# Altium PCB DCCController.1.0.PcbDoc
Units mm, origin at the board's own origin, x right, y up, seen from the top; angles counter-clockwise.
Board outline 152.4 x 101.6 mm, 2 copper layers (Top Layer, Bottom Layer); 54 components, 75 nets, 242 pads, 18 vias.
Unrouted connection lines stored in the file: 1.
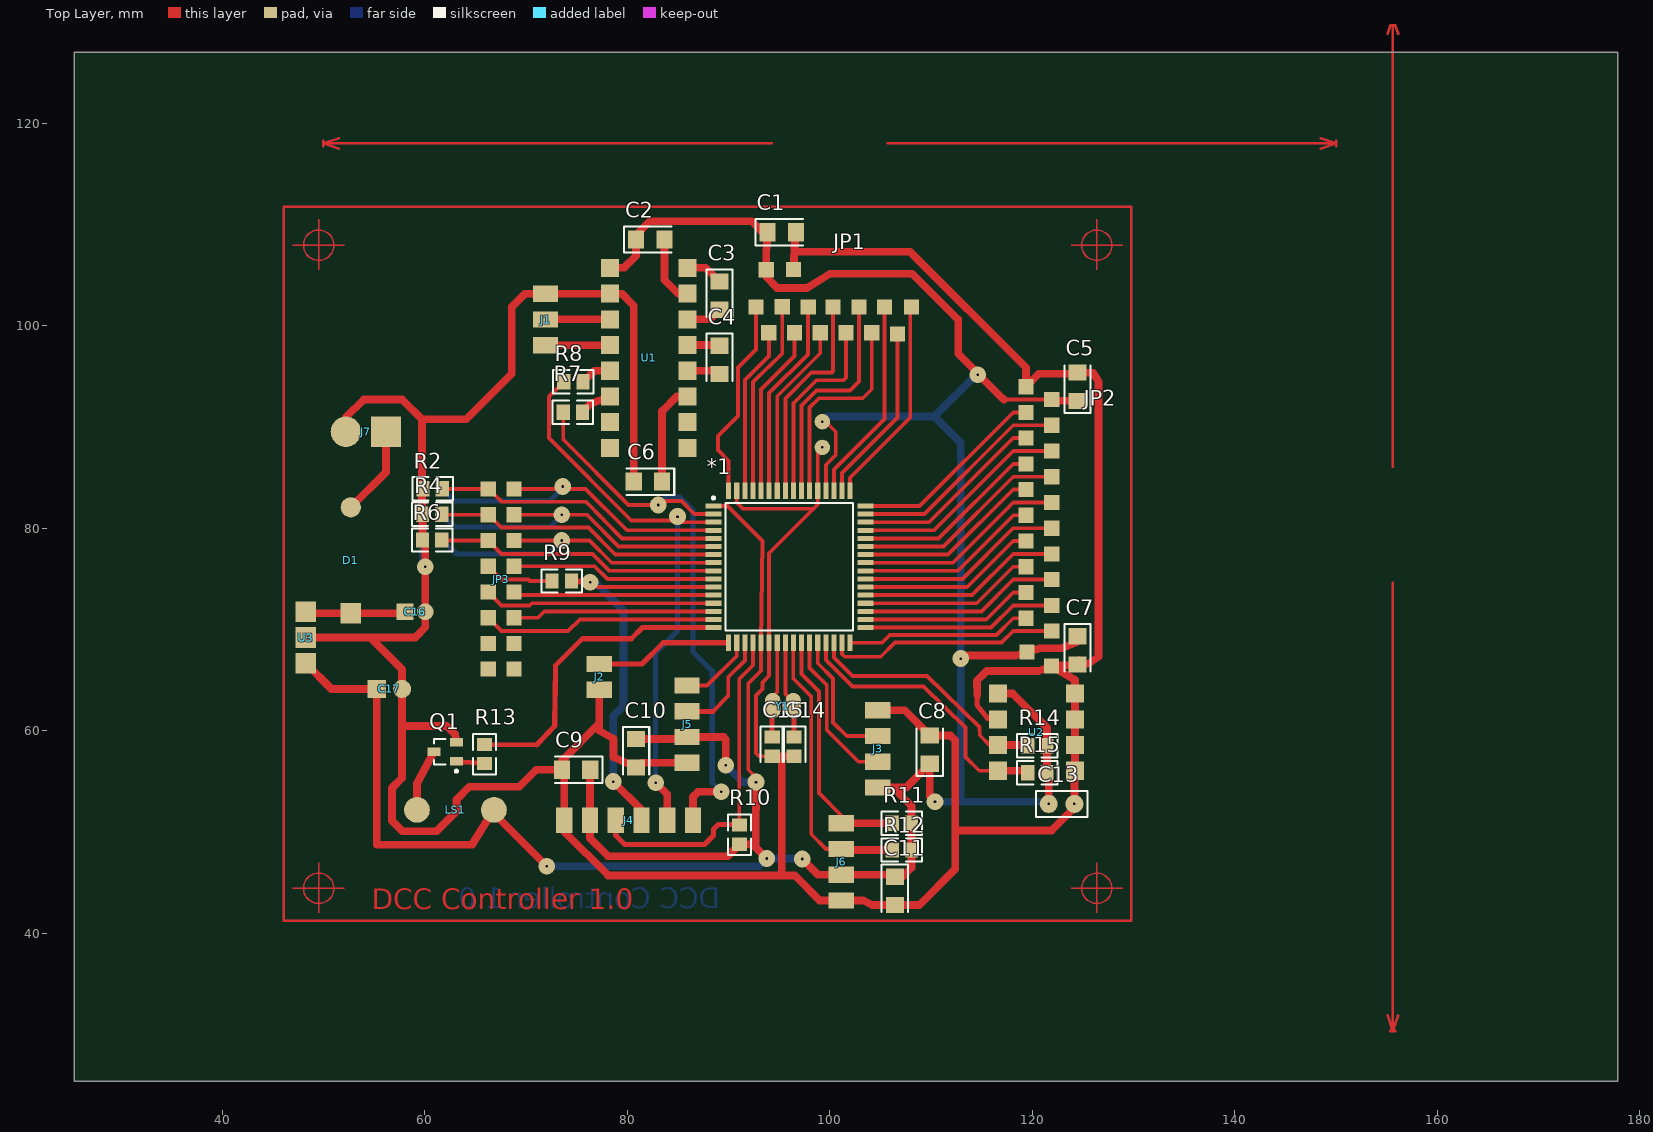
[diagram p0: Top Layer view]
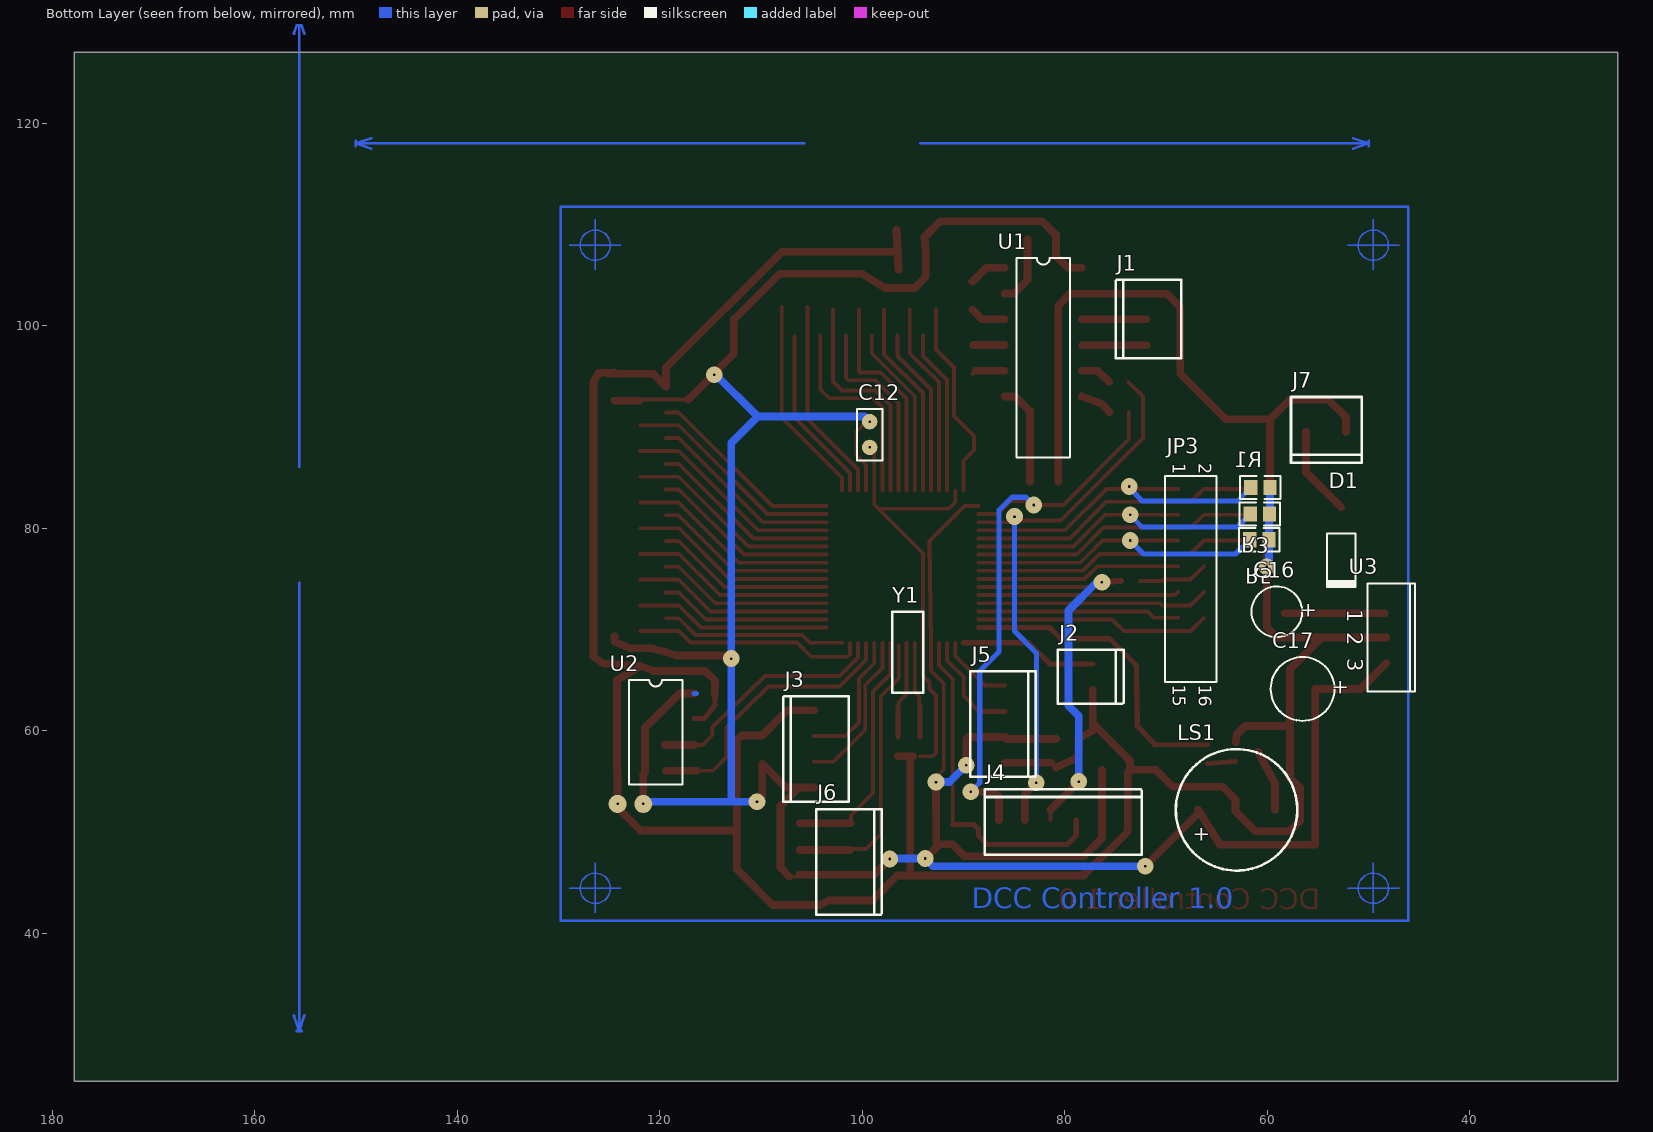
[diagram p1: Bottom Layer view, seen from below]

## Layer stack, top to bottom
Top Layer: signal copper 0.0356
Dielectric: dielectric 0.32, FR-4, Dk 4.8
Bottom Layer: signal copper 0.0356

## Board outline
25.4,25.4 177.8,25.4 177.8,127 25.4,127

## Design rules (kind name [scope] priority, off if disabled: settings)
Clearance [All] p1: gap=0.254
ComponentClearance [All] p1: gap=0.254 collisioncheckmode=0
PolygonConnect [All] p1: connectstyle=Relief reliefconductorwidth=0.254 reliefentries=4 polygonreliefangle="90 Angle"
RoutingLayers [All] p1: top layer=Horizontal bottom layer=Vertical
RoutingVias [All] p1: holewidth=0.711 width=1.27 viastyle="Through Hole" minholewidth=0.711 minwidth=1.27 maxholewidth=0.711 maxwidth=1.27
SolderMaskExpansion [All] p1: expansion=0.102
TestPointUsage [All] p1: valid=0 allowmultiple=FALSE
Testpoint [All] p1: side=15 testpointundercomponent=TRUE minsize=1.016 maxsize=2.54 preferedsize=1.524 minholesize=0 maxholesize=1.016 preferedholesize=0.813 testpointgrid=0.025 style=1023 order=-539222988
Width [All] p1: maxlimit=1.27 minlimit=0.254 preferedwidth=0.508 toplayer_prefwidth=0.762 bottomlayer_prefwidth=0.762 minimp=50.000000 maximp=50.000000 favimp=50.000000
16 further rules are at their usual default settings.

## Classes and differential pairs
component class DCCController: *1 C1 C2 C3 C4 C5 C6 C7 C8 C9 C10 C11 C12 C13 C14 C15 C16 C17 D1 J1 J2 J3 J4 J5 J6 J7 JP1 JP2 JP3 LS1 Q1 R1 R2 R3 R4 R5 R6 R7 R8 R9 R10 R11 R12 R13 R15 U1 U2 U3 Y1

## Components (designator, comment, footprint, x,y, rotation, side; value= is the part's Value field where it differs from the comment)
*1 "Atmega128" 64A 96.012,76.2 r0 top
C1 "Cap Pol1" CC3216-1206 95.25,109.22 r0 top
C2 "Cap Pol1" CC3216-1206 82.271,108.509 r0 top
C3 "Cap Pol1" CC3216-1206 89.103,102.972 r270 top
C4 "Cap Pol1" CC3216-1206 89.103,96.622 r270 top
C5 "Cap Pol1" CC3216-1206 124.46,93.98 r90 top
C6 "Cap Pol1" CC3216-1206 82.042,84.607 r180 top
C7 "Cap Pol1" CC3216-1206 124.46,67.945 r270 top
C8 "Cap Pol1" CC3216-1206 109.88,58.141 r90 top
C9 "Cap Pol1" CC3216-1206 74.955,56.159 r180 top
C10 "Cap Pol1" CC3216-1206 80.874,57.785 r270 top
C11 "Cap Pol1" CC3216-1206 106.426,44.196 r270 top
C12 "Cap" RAD-0.1#1 99.263,89.256 r270 bottom
C13 "Cap" RAD-0.1#2 122.885,52.781 r0 top
C14 "Cap" CC2012-0805 96.469,58.445 r270 top
C15 "Cap" CC2012-0805 94.31,58.445 r270 top
C16 "Cap Pol1" CAPPR2-5X11 59.055,71.755 r0 bottom
C17 "Cap Pol1" CAPPR2.5-6.3X11.5 56.515,64.135 r0 bottom
D1 "Diode 1N4001" DIO10.46-5.3x2.8 52.705,76.835 r270 bottom
J1 "RS232" "0.1 SIP 3 PIN" 69.393,98.069 r180 bottom
J2 "DCCOut" "0.1 SIP 2 PIN" 79.781,69.139 r0 bottom
J3 "LCD" "0.1 SIP 4 PIN" 102.21,56.947 r180 bottom
J4 "ISP" "0.1 SIP 6 PIN" 78.867,48.641 r270 bottom
J5 "Throttle Quadrature" "0.1 SIP 4 PIN" 88.443,61.925 r0 bottom
J6 "External CABs" "0.1 SIP 4 PIN" 103.657,48.336 r0 bottom
J7 "SIP2 CONNECTOR" "0.156 SIP 2 PIN" 48.26,92.075 r90 bottom
JP1 "Header 15" HDR1X15 90.551,119.38 r0 top
JP2 "Header 22" HDR1X22 148.844,106.68 r270 top
JP3 "Keypad" HDR2X8 68.809,83.871 r270 bottom
LS1 "Buzzer" "Mini PC Mount Piezo" 66.833,52.197 r180 bottom
Q1 "" SO-G3 62.027,57.937 r90 top
R1 "Res2" CR2012-0805 60.681,84.023 r180 bottom
R2 "Res2" CR2012-0805 60.782,83.896 r180 top
R3 "Res2" CR2012-0805 60.731,81.407 r180 bottom
R4 "Res2" CR2012-0805 60.731,81.382 r180 top
R5 "Res2" CR2012-0805 60.782,78.867 r180 bottom
R6 "Res2" CR2012-0805 60.731,78.842 r180 top
R7 "Res2" CR2012-0805 74.625,91.465 r180 top
R8 "Res2" CR2012-0805 74.676,94.463 r180 top
R9 "Res2" CR2012-0805 73.533,74.803 r0 top
R10 "Res2" CR2012-0805 91.084,49.759 r90 top
R11 "Res2" CR2012-0805 107.112,50.876 r0 top
R12 "Res2" CR2012-0805 107.112,48.235 r0 top
R13 "Res1" R2012-0805 65.913,57.709 r270 top
R14 "Res2" CR2012-0805 120.498,58.522 r180 top
R15 "Res2" CR2012-0805 120.498,55.855 r180 top
U1 "MAX232ACPE" PE16A 82.118,96.825 r270 bottom
U2 "24LC256" 8P3 120.396,59.868 r270 bottom
U3 "LM7805CT" T03B 48.26,69.215 r270 bottom
Y1 "XTAL" "Xtal Cylinder" 95.504,62.484 r180 bottom
? "" Crosshair 126.365,107.95 r270 top
? "" Crosshair 126.365,44.45 r270 top
? "" Crosshair 49.53,44.45 r270 top
? "" Crosshair 49.53,107.95 r270 top

## Footprints (in the part's own frame and the unit in brackets; to place one, negate y for a bottom-side part, rotate by r counter-clockwise, add the part's x,y. Pads: shape width x height; smd on the part's side, far side on the other; paste and mask are expansions set on the pad)
"0.1 SIP 2 PIN" [mm] "0.1 SIP 2 PIN"
  rect 2.5x1.6 smd far side: 1(-2.54,5.08) 2(-2.54,2.54)
  silkscreen extent -5.59,1.14 0.89,6.48
"0.1 SIP 3 PIN" [mm] "0.1 SIP 3 PIN"
  rect 2.5x1.6 smd far side: 1(-2.54,5.08) 2(-2.54,2.54) 3(-2.54,0)
  silkscreen extent -5.59,-1.27 0.89,6.48
"0.1 SIP 4 PIN" [mm] "0.1 SIP 4 PIN"
  rect 2.5x1.6 smd far side: 1(-2.54,5.08) 2(-2.54,2.54) 3(-2.54,0) 4(-2.54,-2.54)
  silkscreen extent -5.59,-3.94 0.89,6.48
"0.1 SIP 6 PIN" [mm] "0.1 SIP 6 PIN"
  rect 2.5x1.6 smd far side: 1(-2.54,5.08) 2(-2.54,2.54) 3(-2.54,0) 4(-2.54,-2.54) 5(-2.54,-5.08) 6(-2.54,-7.62)
  silkscreen extent -5.59,-9.02 0.89,6.48
"0.156 SIP 2 PIN" [mm]
  rect 3x3 smd far side: 1(-2.54,7.92)
  round 3 smd far side: 2(-2.54,3.96)
  silkscreen extent -5.59,2.41 0.89,9.4
8P3 [mil] "DIP; 8 Leads; Row Spacing 7.62 mm; Pitch 2.54 mm"
  rect 70x70 smd far side: 1(-150,-150) 2(-50,-150) 3(50,-150) 4(150,-150) 5(150,150) 6(50,150) 7(-50,150) 8(-150,150)
  silkscreen extent -203,-104 203,104
64A [mm] "QFP; 64 Leads; Body 14 x 14 mm; Pitch 0.8 mm"
  rect 1.6x0.5 smd: 1(-7.5,6) 2(-7.5,5.2) 3(-7.5,4.4) 4(-7.5,3.6) 5(-7.5,2.8) 6(-7.5,2) 7(-7.5,1.2) 8(-7.5,0.4) 9(-7.5,-0.4) 10(-7.5,-1.2) 11(-7.5,-2) 12(-7.5,-2.8) 13(-7.5,-3.6) 14(-7.5,-4.4) 15(-7.5,-5.2) 16(-7.5,-6) 33(7.5,-6) 34(7.5,-5.2) 35(7.5,-4.4) 36(7.5,-3.6) 37(7.5,-2.8) 38(7.5,-2) 39(7.5,-1.2) 40(7.5,-0.4) 41(7.5,0.4) 42(7.5,1.2) 43(7.5,2) 44(7.5,2.8) 45(7.5,3.6) 46(7.5,4.4) 47(7.5,5.2) 48(7.5,6)
  rect 0.5x1.6 smd: 17(-6,-7.5) 18(-5.2,-7.5) 19(-4.4,-7.5) 20(-3.6,-7.5) 21(-2.8,-7.5) 22(-2,-7.5) 23(-1.2,-7.5) 24(-0.4,-7.5) 25(0.4,-7.5) 26(1.2,-7.5) 27(2,-7.5) 28(2.8,-7.5) 29(3.6,-7.5) 30(4.4,-7.5) 31(5.2,-7.5) 32(6,-7.5) 49(6,7.5) 50(5.2,7.5) 51(4.4,7.5) 52(3.6,7.5) 53(2.8,7.5) 54(2,7.5) 55(1.2,7.5) 56(0.4,7.5) 57(-0.4,7.5) 58(-1.2,7.5) 59(-2,7.5) 60(-2.8,7.5) 61(-3.6,7.5) 62(-4.4,7.5) 63(-5.2,7.5) 64(-6,7.5)
  silkscreen extent -7.62,-6.3 6.3,6.92
CAPPR2-5X11 [mil]
  rect 65x65 smd far side: 1(-39.37,0)
  round 65 smd far side: 2(39.37,0)
  silkscreen extent -98,-98 98,98
CAPPR2.5-6.3X11.5 [mil]
  rect 70x70 smd far side: 1(-49.21,0)
  round 70 smd far side: 2(49.21,0)
  silkscreen extent -124,-124 124,124
CC2012-0805 [mm]
  rect 1.3x1.5 smd: 1(-0.95,0) 2(0.95,0)
  silkscreen extent -2,-1.15 1.5,1.15
CC3216-1206 [mm]
  rect 1.6x1.8 smd: 1(-1.4,0) 2(1.4,0)
  silkscreen extent -2.6,-1.3 2.1,1.3
CR2012-0805 [mm]
  rect 1.3x1.5 smd: 1(-0.95,0) 2(0.95,0)
  silkscreen extent -2,-1.15 2,1.15
Crosshair [mm] "Mounting Hole pad"
  Multi-Layer circle w0.127: c0,0 r1.5
  Multi-Layer lines w0.127: 0,-2.54 0,2.54 ; 2.413,0 -2.54,0
DIO10.46-5.3x2.8 [mm]
  round 2 smd far side: 1(-5.23,0)
  rect 2x2 smd far side: 2(5.23,0)
  silkscreen extent -2.65,-1.4 2.75,1.4
HDR1X15 [mil] "Connector; Header; 15 Position"
  rect 59.06x59.06 smd: 1(231,-544) 2(125,-545) 3(85,-690) 4(135,-790) 5(187,-689) 6(235,-790) 7(288,-690) 8(335,-790) 9(385,-690) 10(435,-790) 11(485,-690) 12(535,-790) 13(585,-690) 14(635,-795) 15(690,-690)
HDR1X22 [mil] "Connector; Header; 22 Position"
  rect 59.06x59.06 smd: 1(500,-1160) 2(550,-1060) 3(600,-1160) 4(650,-1060) 5(700,-1160) 6(750,-1060) 7(800,-1160) 8(850,-1060) 9(900,-1160) 10(950,-1060) 11(1000,-1160) 12(1050,-1060) 13(1100,-1160) 14(1150,-1060) 15(1200,-1160) 16(1250,-1060) 17(1300,-1160) 18(1350,-1060) 19(1400,-1160) 20(1450,-1060) 21(1531,-1156) 22(1586,-1061)
HDR2X8 [mm] "Connector; Header; 8x2 Position"
  rect 1.5x1.5 smd far side: 1(0,0) 2(0,2.54) 3(2.54,0) 4(2.54,2.54) 5(5.08,0) 6(5.08,2.54) 7(7.62,0) 8(7.62,2.54) 9(10.16,0) 10(10.16,2.54) 11(12.7,0) 12(12.7,2.54) 13(15.24,0) 14(15.24,2.54) 15(17.78,0) 16(17.78,2.54)
  silkscreen extent -1.27,-1.27 19.05,3.81
"Mini PC Mount Piezo" [mil]
  round 100 smd far side: 1(0,0) 2(299.21,0)
  silkscreen extent -87,-236 386,236
PE16A [mil] "DIP; 16 Leads; Row Spacing 7.62 mm; Pitch 2.54 mm"
  rect 70x70 smd far side: 1(-350,-150) 2(-250,-150) 3(-150,-150) 4(-50,-150) 5(50,-150) 6(150,-150) 7(250,-150) 8(350,-150) 9(350,150) 10(250,150) 11(150,150) 12(50,150) 13(-50,150) 14(-150,150) 15(-250,150) 16(-350,150)
  silkscreen extent -388,-104 388,104
R2012-0805 [mm]
  rect 1.3x1.5 smd: 1(-0.95,0) 2(0.95,0)
  silkscreen extent -2,-1.15 2,1.15
RAD-0.1#1 [mil]
  round 60 hole 10: 1(-50,0) 2(50,0)
  silkscreen extent -100,-50 100,50
RAD-0.1#2 [mil]
  round 70 hole 10: 1(-50,0) 2(50,0)
  silkscreen extent -100,-50 100,50
SO-G3 [mm]
  rect 0.85x1.3 smd: 1(-0.95,-1.1) 2(0.95,-1.1) 3(0,1.1)
  silkscreen extent -2.05,-1.22 1.28,1.1
T03B [mil] "TO, Thru-Hole, Vertical, Heatsink Mounted; 3 In-Line Leads; Pitch 2.54 mm"
  rect 80x80 smd far side: 1(-100,0) 2(0,0) 3(100,0)
  silkscreen extent -211,-73 211,112
"Xtal Cylinder" [mil]
  oval 60x99.37 smd far side: 1(-35,0) 2(45,0)
  silkscreen extent -60,50 60,365

## Part data
C1 C2 C3 C4 C5 C6 C7 C8 C9 C10 C11 C16 C17: "Polarized Capacitor (Radial)"
C12 C13 C14 C15: "Capacitor"
D1: "1 Amp General Purpose Rectifier"
J1: library part "SIP3 CONNECTOR"
J2: library part "SIP2 CONNECTOR"
J3 J5 J6: library part "SIP4 CONNECTOR"
J4: library part "SIP6 CONNECTOR"
JP1: "Header, 15-Pin"
JP2: "Header, 22-Pin"
JP3: library part "Header 8X2", "Header, 8-Pin, Dual row"
LS1: "Magnetic Transducer Buzzer"
Q1: library part MMBT100A, "General Purpose Amplifier NPN Silicon"
R1 R2 R3 R4 R5 R6 R7 R8 R9 R10 R11 R12 R13 R14 R15: "Resistor"
U1: "+5V Powered, Multi-Channel RS-232 Driver/Receiver"
U3: "Series 3-Terminal Positive Regulator"
Y1: "Crystal Oscillator"

## Via types
v1: diameter 1.651, hole 0.254, Top Layer to Bottom Layer, 18 vias

## Nets (pads, with @x,y where several pads share a name; then routed paths per layer and width w, separated by ;. In a path a pad name is that pad's centre, name@x,y a point inside that pad or via, vN(x,y) a via of type N, cw(c..) or ccw(c..) an arc to the next point about the centre after c; other vN are vias at no path point)
GND: *1.22 *1.53 *1.63 C1.2 C5.2 C6.2 C7.2 C8.2 C9.2 C10.2 C11.2 C12.2 C13.2 C14.2 C15.2 C16.2 C17.2 J1.1 J2.1 J3.1 J4.1 J5.1 J6.1 J7.2 JP1.1 JP2.1 JP2.22 Q1.2 R1.2 R2.2 R3.2 R4.2 R5.2 R6.2 U1.15 U2.1 U2.2 U2.3 U2.4 U2.7 U3.2 | length 412.8
  Top Layer w0.381: R6.2 R6.2@60.055,78.568 ; C9.2 C9.2@73.787,55.928 ; U1.15@78.283,103.149 U1.15 ; C10.2 C10.2@81.334,56.845 ; *1.63 90.812,82.557 91.44,81.929 98.411,81.929 ; C15.2 93,57.495 92.71,57.785 92.71,63.5 93.345,64.135 93.345,64.77 94.012,65.437 94.012,77.53 98.812,82.33 98.812,87.89 C12.2@99.187,88.265 ; C15.2@94.96,57.495 95.25,57.495 ; C1.2@96.622,109.449 96.65,107.315 ; U2.7 U2.7@116.586,61.214 ; U2.4@124.155,56.007 U2.4 ; C7.2 C7.2@124.638,67.205
  Top Layer w0.508: 114.554,63.525 114.529,62.535 115.595,61.214 U2.7@116.586,61.214
  Top Layer w0.762: U3.2 59.055,69.215 60.055,70.215 R6.2@60.055,78.568 ; J7.2 52.22,90.955 53.975,92.71 57.785,92.71 59.731,90.764 ; 54.61,69.215 57.765,66.06 57.765,55.352 56.769,54.356 56.769,51.13 57.81,50.089 61.163,50.089 63.144,52.07 63.144,53.213 64.414,54.483 69.342,54.483 71.018,56.159 C9.2 73.555,57.045 77.241,60.731 ; 57.765,60.477 62.179,60.477 63.017,59.639 Q1.2 ; R4.2@59.731,81.432 59.731,90.764 ; R6.2 R4.2 ; C9.2@73.787,55.928 73.787,50.038 78.105,45.72 96.52,45.72 98.984,43.256 J6.1 103.302,43.256 104.191,42.799 C11.2 108.836,42.796 112.395,46.355 112.395,59.055 111.909,59.541 C8.2 107.394,62.027 J3.1 ; J2.1 77.241,60.017 78.638,59.207 78.638,57.404 C10.2 ; C6.2 80.642,101.984 79.477,103.149 J1.1 69.901,103.149 68.605,101.854 68.605,95.275 64.094,90.764 59.731,90.764 ; C10.2@81.334,56.845 J5.1 ; C15.2@94.96,57.495 C14.2 ; 95.25,45.72 95.25,57.495 ; JP1.1 C1.2@96.622,109.449 ; 96.65,107.315 107.925,107.315 119.38,95.86 JP2.1 120.65,95.25 C5.2@125.095,95.25 ; 112.395,50.165 121.92,50.165 124.155,52.4 U2.4@124.155,56.007 ; 114.554,63.525 114.529,64.948 115.519,65.913 120.599,65.913 JP2.22 ; U2.4 124.206,65.024 JP2.22 ; C7.2 JP2.22 ; C5.2 125.984,95.352 126.543,94.463 126.543,67.335 125.524,66.621 C7.2@124.485,66.621
  Bottom Layer w0.508: v1@59.832,76.423 v1(60.055,76.2)
  Bottom Layer w0.762: R3.2@59.731,81.458 R1.2 ; v1@59.832,76.423 R3.2@59.832,81.356
Net*1_2: *1.2 J4.6 R7.2 | length 59.4
  Top Layer w0.381: R7.2 73.675,88.758 80.137,82.296 v1(83.058,82.296) 83.439,82.677 85.344,82.677 86.621,81.4 *1.2
  Top Layer w0.762: J4.6 86.487,53.467 86.995,53.975 v1(89.281,53.975)
  Bottom Layer w0.508: v1(83.058,82.296) 83.82,83.058 85.217,83.058 86.487,81.788 86.487,67.818 88.392,65.913 88.392,54.864 v1(89.281,53.975)
Net*1_3: *1.3 J4.5 R8.2 | length 57.5
  Top Layer w0.381: R8.2 72.263,93 72.263,88.9 80.391,80.772 84.582,80.772 v1(84.963,81.153) 85.516,80.6 *1.3
  Top Layer w0.762: v1(82.804,54.864) 83.947,53.721 J4.5
  Bottom Layer w0.508: v1(82.804,54.864) 82.804,67.691 84.963,69.85 v1(84.963,81.153)
Net*1_4: *1.4 JP3.1 R1.1 | length 34.6
  Top Layer w0.381: JP3.1 75.895,83.871 79.966,79.8 *1.4
  Bottom Layer w0.508: R1.1 62.977,82.677 72.39,82.677 v1(73.635,84.125)
Net*1_5: *1.5 JP3.2 R2.1 | length 28.8
  Top Layer w0.381: R2.1@61.758,83.871 JP3.2 67.589,82.626 75.946,82.626 79.496,79 *1.5
Net*1_6: *1.6 JP3.3 R3.1 | length 33.9
  Top Layer w0.381: JP3.3 76.022,81.331 79.153,78.2 *1.6
  Bottom Layer w0.508: R3.1 62.951,80.137 72.39,80.137 v1(73.533,81.331)
Net*1_7: *1.7 JP3.4 R4.1 | length 28.4
  Top Layer w0.381: R4.1@61.732,81.331 JP3.4 67.564,80.061 76.175,80.061 78.81,77.4 *1.7
Net*1_8: *1.8 JP3.5 R5.1 | length 33.5
  Top Layer w0.381: JP3.5 76.276,78.791 78.467,76.6 *1.8
  Bottom Layer w0.508: R5.1 63.129,77.47 72.212,77.47 v1(73.533,78.791)
Net*1_9: *1.9 JP3.6 R6.1 | length 28
  Top Layer w0.381: R6.1@61.732,78.791 JP3.6 67.589,77.47 76.581,77.47 78.251,75.8 *1.9
Net*1_10: *1.10 JP3.7 | length 20.2
  Top Layer w0.381: JP3.7 76.784,76.251 78.035,75 *1.10
Net*1_11: *1.11 J4.4 R9.2 | length 41.1
  Top Layer w0.381: v1@76.2,74.803 v1(76.327,74.676) 77.114,74.193 *1.11 ; J4.4 J4.4@81.407,52.197
  Top Layer w0.635: R9.2 v1(76.327,74.676)
  Top Layer w0.762: v1(78.613,54.991) J4.4@81.407,52.197
  Bottom Layer w0.508: v1(76.327,74.676) v1@76.835,74.676
  Bottom Layer w0.762: v1@76.835,74.676 79.629,71.882 79.629,62.484 78.613,61.468 v1(78.613,54.991)
Net*1_12: *1.12 JP3.9 | length 19.8
  Top Layer w0.381: JP3.9 69.119,73.4 *1.12
Net*1_13: *1.13 JP3.10 | length 22.9
  Top Layer w0.381: JP3.10 67.589,72.39 70.358,72.39 70.568,72.6 *1.13
Net*1_14: *1.14 JP3.11 | length 20
  Top Layer w0.381: JP3.11 71.171,71.171 71.8,71.8 *1.14
Net*1_15: *1.15 JP3.12 | length 23.3
  Top Layer w0.381: JP3.12 67.589,69.85 74.168,69.85 75.318,71 *1.15
Net*1_16: *1.16 R13.1 | length 30.9
  Top Layer w0.508: R13.1 71.044,58.598 72.847,60.477 72.898,66.421 75.565,69.088 80.391,69.088 81.503,70.2 *1.16
Net*1_17: *1.17 J2.2 | length 13.6
  Top Layer w0.508: J2.2 81.458,66.599 83.559,68.7 *1.17
Net*1_18: *1.18 J5.4 | length 7.4
  Top Layer w0.381: J5.4 87.884,64.465 90.812,67.393 *1.18
Net*1_19: *1.19 J5.3 | length 10.6
  Top Layer w0.381: 88.468,61.925 89.967,63.424 89.967,65.29 91.612,66.935 *1.19
  Top Layer w0.508: J5.3 88.468,61.925
Net*1_20: *1.20 J4.3 R10.2 | length 33.8
  Top Layer w0.381: R10.2@91.059,50.734 91.059,62.992 91.059,65.126 92.412,66.479 *1.20
  Top Layer w0.508: J4.3 78.867,49.657 79.756,48.768 87.63,48.768 88.519,49.657 88.519,50.292 88.961,50.734 R10.2@91.059,50.734
Net*1_23: *1.23 C15.1 Y1.2 | length 9.4
  Top Layer w0.381: Y1.2 94.361,63.373 94.812,63.824 *1.23
  Top Layer w0.508: C15.1 Y1.2@94.31,62.433
Net*1_24: *1.24 C14.1 Y1.1 | length 9.6
  Top Layer w0.381: *1.24 95.612,63.646 96.393,62.865 Y1.1
  Top Layer w0.508: C14.1 Y1.1@96.469,62.408
Net*1_25: *1.25 J6.3 R12.1 | length 27.9
  Top Layer w0.381: *1.25@96.393,68.453 96.393,65.151 98.171,63.373 98.171,49.784 99.619,48.336 J6.3
  Top Layer w0.762: J6.3@101.219,48.235 R12.1
Net*1_26: *1.26 J6.4 R11.1 | length 24.5
  Top Layer w0.381: *1.26 97.212,65.602 98.933,63.881 98.933,53.848 101.117,51.664 J6.4
  Top Layer w0.762: J6.4 R11.1
Net*1_27: *1.27 J3.3 | length 15.7
  Top Layer w0.381: *1.27 98.012,66.199 99.695,64.516 99.695,60.071 102.819,56.947 J3.3
Net*1_28: *1.28 J3.2 | length 13.5
  Top Layer w0.381: *1.28 98.812,66.669 100.33,65.151 100.33,60.833 101.676,59.487 J3.2
Net*1_29: *1.29 R15.2 U2.5 | length 27.9
  Top Layer w0.381: *1.29 99.612,67.012 102.235,64.389 109.245,64.389 113.386,60.325 113.411,57.404 114.757,56.058 U2.5@116.357,56.058 ; R15.2@119.344,56.058 R15.2
  Top Layer w0.762: U2.5@116.357,56.058 R15.2@119.344,56.058
Net*1_30: *1.30 R14.2 U2.6 | length 24.6
  Top Layer w0.381: *1.30 100.412,67.228 102.235,65.405 109.601,65.405 114.783,60.376 114.808,59.563 115.773,58.598 U2.6 ; R14.2@119.471,58.598 R14.2
  Top Layer w0.762: U2.6 R14.2@119.471,58.598
Net*1_31: *1.31 JP2.20 | length 23
  Top Layer w0.381: *1.31 101.212,67.571 101.473,67.31 105.029,67.31 106.426,68.707 116.967,68.707 118.11,69.85 JP2.20
Net*1_32: *1.32 JP2.19 | length 18.4
  Top Layer w0.381: *1.32 105.149,68.7 105.918,69.469 116.459,69.469 118.11,71.12 JP2.19
Net*1_33: *1.33 JP2.18 | length 19.3
  Top Layer w0.381: *1.33 115.92,70.2 118.11,72.39 JP2.18
Net*1_34: *1.34 JP2.17 | length 17
  Top Layer w0.381: *1.34 115.45,71 118.11,73.66 JP2.17
Net*1_35: *1.35 JP2.16 | length 19.7
  Top Layer w0.381: *1.35 114.98,71.8 118.11,74.93 JP2.16
Net*1_36: *1.36 JP2.15 | length 17.4
  Top Layer w0.381: *1.36 114.51,72.6 118.11,76.2 JP2.15
Net*1_37: *1.37 JP2.14 | length 20.1
  Top Layer w0.381: *1.37 114.04,73.4 118.11,77.47 JP2.14
Net*1_38: *1.38 JP2.13 | length 17.7
  Top Layer w0.381: *1.38 113.57,74.2 118.11,78.74 JP2.13
Net*1_39: *1.39 JP2.12 | length 20.5
  Top Layer w0.381: *1.39 113.1,75 118.11,80.01 JP2.12
Net*1_40: *1.40 JP2.11 | length 18.1
  Top Layer w0.381: *1.40 112.63,75.8 118.11,81.28 JP2.11
Net*1_41: *1.41 JP2.10 | length 20.9
  Top Layer w0.381: *1.41 112.16,76.6 118.11,82.55 JP2.10
Net*1_42: *1.42 JP2.9 | length 18.5
  Top Layer w0.381: *1.42 111.69,77.4 118.11,83.82 JP2.9
Net*1_43: *1.43 JP2.8 | length 21.3
  Top Layer w0.381: *1.43 111.22,78.2 118.11,85.09 JP2.8
Net*1_44: *1.44 JP2.7 | length 18.9
  Top Layer w0.381: *1.44 110.75,79 118.11,86.36 JP2.7
Net*1_45: *1.45 JP2.6 | length 21.7
  Top Layer w0.381: *1.45 110.28,79.8 118.11,87.63 JP2.6
Net*1_46: *1.46 JP2.5 | length 19.3
  Top Layer w0.381: *1.46 109.81,80.6 118.11,88.9 JP2.5
Net*1_47: *1.47 JP2.4 | length 22
  Top Layer w0.381: *1.47 109.34,81.4 118.11,90.17 JP2.4
Net*1_48: *1.48 JP2.3 | length 19.7
  Top Layer w0.381: *1.48 108.87,82.2 118.11,91.44 JP2.3
Net*1_49: *1.49 JP1.15 | length 20.6
  Top Layer w0.381: *1.49 102.012,84.994 107.95,90.932 JP1.15@107.95,101.854
Net*1_50: *1.50 JP1.14 | length 17.5
  Top Layer w0.381: *1.50 101.212,85.464 106.68,90.932 JP1.14@106.68,98.933
Net*1_51: *1.51 JP1.13 | length 20.2
  Top Layer w0.381: *1.51 100.412,85.807 105.41,90.805 JP1.13
Net*1_54: *1.54 JP1.12 | length 20.4
  Top Layer w0.381: *1.54 98.012,91.916 98.933,92.837 103.251,92.837 104.14,93.726 JP1.12@104.14,99.06
Net*1_55: *1.55 JP1.11 | length 22.2
  Top Layer w0.381: *1.55 97.212,92.132 98.679,93.599 101.981,93.599 102.87,94.488 JP1.11@102.87,101.6
Net*1_56: *1.56 JP1.10 | length 19.1
  Top Layer w0.381: *1.56 96.412,92.348 98.679,94.615 101.346,94.615 101.6,94.869 JP1.10@101.6,99.06
Net*1_57: *1.57 JP1.9 | length 21
  Top Layer w0.381: *1.57 95.612,92.818 98.171,95.377 100.203,95.377 100.33,95.504 JP1.9@100.33,101.6
Net*1_58: *1.58 JP1.8 | length 17.1
  Top Layer w0.381: *1.58 94.812,93.034 99.06,97.282 JP1.8@99.06,99.06
Net*1_59: *1.59 JP1.7 | length 19.5
  Top Layer w0.381: *1.59 94.012,93.377 97.841,97.155 97.841,101.575 JP1.7@97.866,101.6
Net*1_60: *1.60 JP1.6 | length 16.7
  Top Layer w0.381: *1.60 93.212,93.72 96.52,97.028 JP1.6@96.52,99.06
Net*1_61: *1.61 JP1.5 | length 19.1
  Top Layer w0.381: *1.61 92.412,94.444 95.301,97.257 JP1.5@95.301,101.625
Net*1_62: *1.62 JP1.4 | length 16.3
  Top Layer w0.381: *1.62 91.612,94.66 93.98,97.028 JP1.4@93.98,99.06
Net*1_64: *1.64 JP1.3 | length 19.9
  Top Layer w0.381: *1.64 90.012,86.67 88.951,87.732 88.951,89.103 90.932,91.084 90.932,95.885 92.71,97.663 JP1.3@92.71,101.6
NetC2_2: C2.2 U1.2 | length 6.8
  Top Layer w0.762: C2.2 83.671,104.543 85.039,103.175 U1.2
NetC3_1: C3.1 U1.1 | length 3.7
  Top Layer w0.762: U1.1 87.76,105.715 C3.1
NetC3_2: C3.2 U1.3 | length 3.6
  Top Layer w0.762: U1.3 88.166,100.635 C3.2
NetC4_1: C4.1 U1.4 | length 3.2
  Top Layer w0.381: C4.1@89.03,98.095 C4.1
  Top Layer w0.762: U1.4 C4.1@89.03,98.095
NetC4_2: C4.2 U1.5 | length 3.3
  Top Layer w0.381: C4.2@88.77,95.555 C4.2
  Top Layer w0.762: U1.5 C4.2@88.77,95.555
NetC6_1: C6.1 U1.6 | length 10
  Top Layer w0.762: C6.1 83.442,91.57 84.887,93.015 U1.6
NetC16_1: C16.1 D1.2 U3.1 | length 10.3
  Top Layer w0.381: U3.1 U3.1@48.41,71.605 ; C16.1@58.27,71.605 C16.1@58.42,71.755
  Top Layer w0.762: U3.1@48.41,71.605 C16.1@58.27,71.605
NetJ1_2: J1.2 U1.14 | length 6.4
  Top Layer w0.381: J1.2 J1.2@71.958,100.635
  Top Layer w0.762: J1.2@71.958,100.635 U1.14
NetJ1_3: J1.3 U1.13 | length 6.4
  Top Layer w0.381: U1.13@78.283,98.069 U1.13
  Top Layer w0.762: J1.3 U1.13@78.283,98.069
NetJP3_8: JP3.8 R9.1 | length 6.9
  Top Layer w0.381: JP3.8 67.589,74.93 70.231,74.93 70.358,74.803 R9.1
NetLS1_2: LS1.2 Q1.3 | length 6.2
  Top Layer w0.762: LS1.2 59.233,54.821 Q1.3
NetQ1_1: Q1.1 R13.2 | length 2.8
  Top Layer w0.508: Q1.1 R13.2
NetR7_1: R7.1 U1.11 | length 3.2
  Top Layer w0.762: R7.1 76.352,92.304 U1.11
NetR8_1: R8.1 U1.12 | length 3.1
  Top Layer w0.762: R8.1 76.733,95.529 U1.12
VCC: *1.1 *1.21 *1.52 C1.1 C2.1 C5.1 C7.1 C8.1 C9.1 C10.1 C11.1 C12.1 C13.1 C17.1 J3.4 J4.2 J5.2 J6.2 JP1.2 JP2.2 JP2.21 LS1.1 R10.1 R11.2 R12.2 R14.1 R15.1 U1.16 U2.8 U3.3 | length 344.4
  Top Layer w0.381: LS1.1@66.833,51.861 LS1.1 ; C9.1@76.327,56.131 C9.1 ; J5.2@85.703,59.185 J5.2 ; *1.1 89.885,82.2 93.345,78.74 *1.21 93.212,65.932 91.948,64.668 91.948,56.159 v1@92.71,55.397 ; C12.1@99.314,90.805 100.584,89.535 100.584,87.249 99.612,86.277 *1.52 ; C11.1@106.226,45.796 C11.1 C11.1@107.191,45.596 ; 117.196,92.71 JP2.2 JP2.2@122.05,92.58 ; C13.1@121.463,52.934 C13.1
  Top Layer w0.762: U3.3 50.8,64.135 C17.1 55.27,48.743 64.674,48.743 LS1.1 ; LS1.1@66.833,51.861 v1(72.06,46.634) ; C9.1@76.327,56.131 76.327,49.403 78.105,47.625 89.901,47.625 R10.1 92.365,48.809 v1(93.777,47.396) ; U1.16 79.68,105.715 80.871,106.906 80.871,108.963 82.22,110.312 92.304,110.312 93.85,108.766 93.726,107.287 93.726,104.851 94.793,103.734 97.739,103.734 100.025,105.131 108.153,105.131 112.674,100.609 112.674,97.231 117.196,92.71 ; C10.1 J5.2@85.703,59.185 ; J5.2 89.535,59.385 89.738,59.182 v1(89.738,56.591) ; R10.1@91.481,48.809 92.685,48.819 v1@92.71,55.397 ; v1(97.282,47.346) 98.831,45.796 C11.1@106.226,45.796 ; J3.4 107.547,54.407 C8.1 109.88,53.518 v1(110.388,53.01) ; 106.248,54.407 108.062,52.593 108.062,46.467 C11.1@107.191,45.596 ; v1(112.928,67.132) 113.36,67.437 118.364,67.437 JP2.21 120.675,68.123 122.885,68.148 124.435,68.783 C7.1 ; U2.8 118.059,63.678 121.448,60.289 R15.1 ; C13.1 R15.1@121.615,55.687 ; JP2.2@122.05,92.58 C5.1
  Bottom Layer w0.508: C12.1 C12.1@99.771,91.034 ; v1@114.452,95.174 v1(114.605,95.174) ; 116.383,63.678 116.586,63.678 ; C13.1@121.387,53.01 C13.1
  Bottom Layer w0.762: v1(72.06,46.634) 93.015,46.634 v1(93.777,47.396) v1@97.282,47.396 ; v1(89.738,56.591) 91.389,54.94 v1(92.71,54.94) ; C12.1@99.771,91.034 110.312,91.034 ; v1(110.388,53.01) C13.1@121.387,53.01 ; 112.928,53.035 112.928,88.417 110.312,91.034 ; v1@114.452,95.174 110.312,91.034
VDD: D1.1 J7.1 | length 8.9
  Top Layer w0.762: D1.1 56.18,85.54 J7.1
pads on no net: JP3.13 JP3.14 JP3.15 JP3.16 U1.7 U1.8 U1.9 U1.10

## Other copper
Top Layer:
  text "DCC Controller 1.0" at 54.762,42.393 h2.03
Bottom Layer:
  text "DCC Controller 1.0" at 89.179,42.469 h2.03
Multi-Layer:
  lines w0.254: 50,117.746 50,118.254 ; 51.524,117.492 50,118 ; 51.524,118.508 50,118 ; 94.261,118 50,118 ; 105.739,118 150,118 ; 148.476,117.492 150,118 ; 148.476,118.508 150,118 ; 150,117.746 150,118.254 ; 155.092,31.888 155.6,30.364 ; 155.092,128.84 155.6,130.364 ; 155.346,30.364 155.854,30.364 ; 155.346,130.364 155.854,130.364 ; 155.6,74.625 155.6,30.364 ; 155.6,86.103 155.6,130.364 ; 156.108,31.888 155.6,30.364 ; 156.108,128.84 155.6,130.364 ; 46.101,41.25 46.101,111.76 129.769,111.76 129.769,41.25 46.101,41.25
  text "100 (mm)" at 94.515,117.086 h1.52
  text "100 (mm)" at 156.515,74.879 h1.52 r90

## Text inside footprints (layer, text, board x,y; h text height)
C16: Bottom Overlay "+" at 55.08,72.505 h1.5 r180
C17: Bottom Overlay "+" at 51.89,64.885 h1.5 r180
JP3: Bottom Overlay "2" at 66.777,86.411 h1.27 r90; Bottom Overlay "1" at 69.317,86.411 h1.27 r90; Bottom Overlay "15" at 69.317,64.567 h1.27 r90; Bottom Overlay "16" at 66.777,64.567 h1.27 r90
LS1: Bottom Overlay "+" at 67.341,49.149 h1.52
U3: Bottom Overlay "2" at 52.085,69.715 h1.5 r90; Bottom Overlay "1" at 52.085,72.005 h1.5 r90; Bottom Overlay "3" at 52.085,67.175 h1.5 r90